# EAGLE board testPresssureSensor (EAGLE 8.2.1)
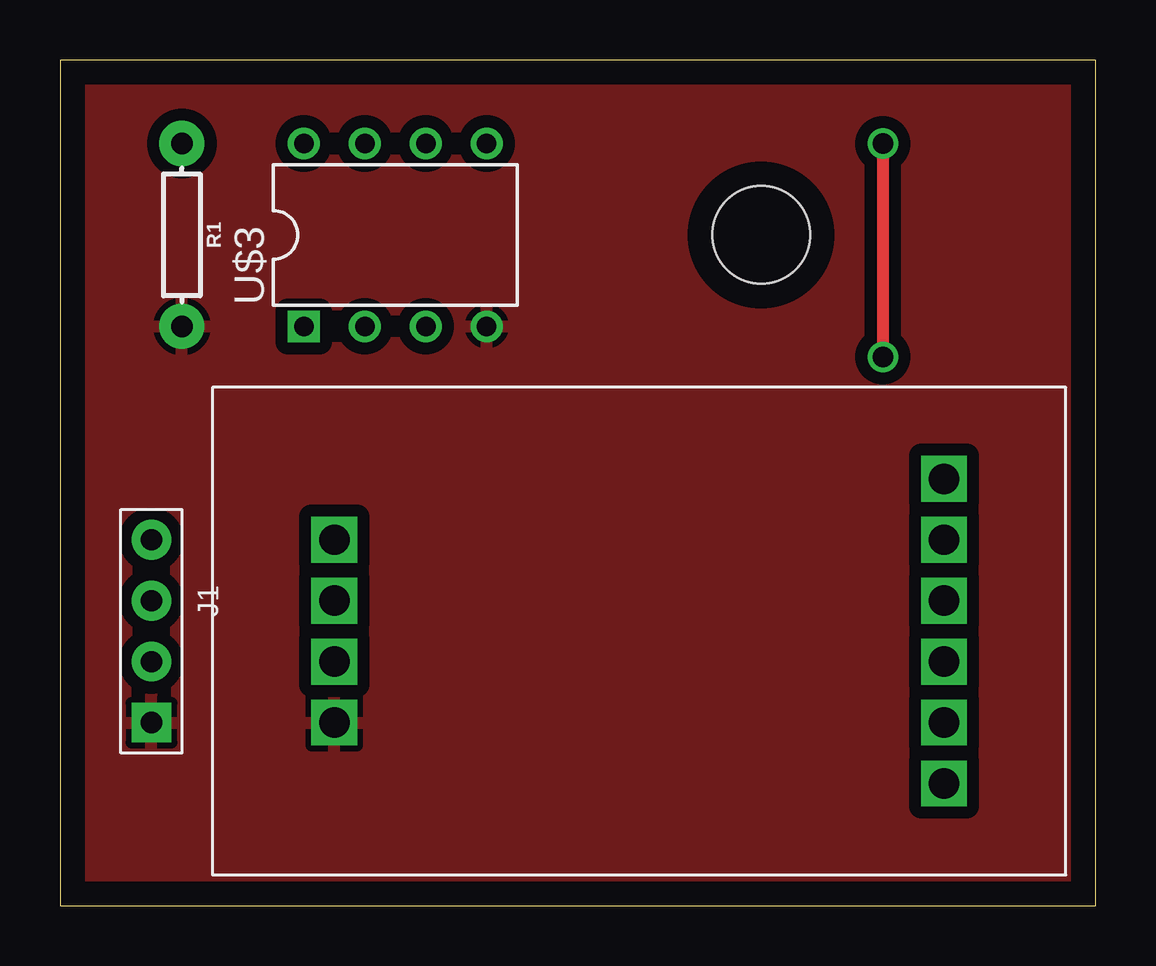
[diagram p0: board, top side]
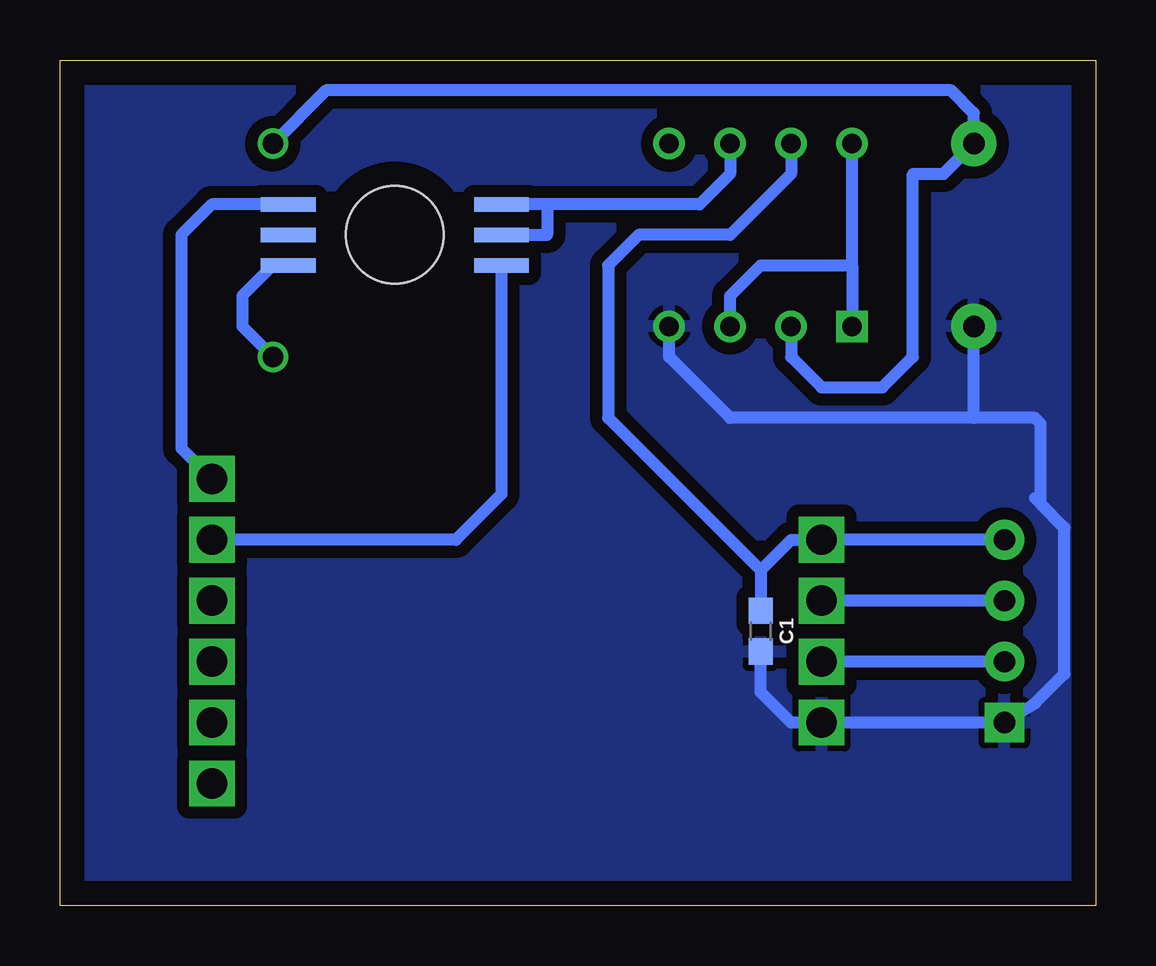
[diagram p1: board, bottom side, seen from below]

Size 43.16 x 35.23 mm. Coordinates in mm from the lower left corner, seen from the top.
Outline: 0,0 43.16,0 43.16,35.23 0,35.23 0,0
Copper layers (1*16): Top 0.035mm / dielectric 1.5mm / Bottom 0.035mm
Design rules "default *": minimum track width 6mil, minimum drill 0.35mm, track to track 20mil, track to pad 20mil, pad to pad 20mil, via to via 20mil, smd to smd 20mil, copper to edge 40mil, drill to drill 6mil, minimum pad ring 10mil, minimum via ring 8mil, stop-mask expansion 4mil, vias tented up to drill 0mil, thermal gap 10mil

## Footprints (pad centres in the part's own frame; a part is rotated, then mirrored left to right if it is on the bottom)
0603 = smd 1.1 x 1: 1 -0.85,0; 2 0.85,0
H4-2.54 = drill 0.889 pad 1.651 square: 1 0,3.81 | drill 0.889 pad 1.651: 2 0,1.27; 3 0,-1.27; 4 0,-3.81
AXIAL-0.3 = drill 0.9 pad 1.88: P$1 -3.81,0; P$2 3.81,0
2SMPP-03 = smd 2.286 x 0.61 bottom: P$1 4.445,1.27; P$2 4.445,0; P$3 4.445,-1.27; P$4 -4.445,-1.27; P$5 -4.445,0; P$6 -4.445,1.27 | hole 4.064: 0,0
HX711 = drill 1.27 square: P$1 -12.7,6.35; P$2 -12.7,3.81; P$3 -12.7,1.27; P$4 -12.7,-1.27; P$5 -12.7,-3.81; P$6 -12.7,-6.35; P$7 12.7,3.81; P$8 12.7,1.27; P$9 12.7,-1.27; P$10 12.7,-3.81
DIP8 = drill 0.813 square: 1 -3.81,-3.81 | drill 0.813: 2 -1.27,-3.81; 3 1.27,-3.81; 4 3.81,-3.81; 5 3.81,3.81; 6 1.27,3.81; 7 -1.27,3.81; 8 -3.81,3.81

## Placement (x,y rotation side)
C1  0.1uF  [0603]  13.97,11.43 270 bottom
J1  4p-2.54  [H4-2.54]  3.81,11.43 180 top
R1  1k  [AXIAL-0.3]  5.08,27.94 270 top
U$1  2SMPP-03  [2SMPP-03]  29.21,27.94 0 top
U$2  HX711  [HX711]  24.13,11.43 180 top
U$3  LM10CN  [DIP8]  13.97,27.94 0 top

## Library data of the parts
C1 = SparkFun-Capacitors; PROD_ID: CAP-00810
J1 = Seeed-Connector -2016; MPN: P125-1104A0BS116A1
R1 = SparkFun-Resistors; PROD_ID: RES-12182
U$1-U$3 = programmable-air-components

## Nets
GND: C1.2 J1.1 R1.P$2 U$2.P$7 U$3.4
N$1: U$1.P$4 U$2.P$5
N$2: U$3.1 U$3.3 U$3.8
N$3: U$1.P$5 U$1.P$6 U$3.6
N$4: R1.P$1 U$1.P$3 U$3.2
N$5: U$1.P$1 U$2.P$6
N$6: J1.2 U$2.P$8
N$7: J1.3 U$2.P$9
VIN: C1.1 J1.4 U$2.P$10 U$3.7

## Tracks (layer width: path | path; a pad name or v marks a point on that pad's centre or on a via)
GND
  Bottom 0.508: 2.3,16.75 1.31,15.75 1.31,9.65 2.54,8.42 J1.1 U$2.P$7 12.7,7.62 13.97,8.89 C1.2 | 2.3,16.75 2.54,16.98 | U$3.4 17.78,22.86 15.24,20.32 5.08,20.32 | 2.3,16.75 2.3,20.08 2.54,20.32 5.08,20.32 | 5.08,20.32 R1.P$2
  pour Top: 0,35.56 43.18,35.56 43.18,0 0,0
  pour Bottom: 0,35.56 43.18,35.56 43.18,0 0,0
N$1
  Bottom 0.508: U$1.P$4 24.77,17.14 26.67,15.24 U$2.P$5
N$2
  Bottom 0.508: 10.16,26.67 U$3.1 | 10.16,26.67 U$3.8 | U$3.3 15.24,25.4 13.97,26.67 10.16,26.67
N$3
  Bottom 0.508: U$1.P$5 22.86,27.94 22.86,29.21 | 22.86,29.21 U$1.P$6 | U$3.6 15.24,30.48 16.51,29.21 22.86,29.21
N$4  (via drill 0.85)
  Top 0.508: v34.29,31.75 v34.29,22.86
  Bottom 0.508: U$3.2 12.7,22.86 11.43,21.59 8.89,21.59 7.62,22.86 7.62,30.48 6.35,30.48 R1.P$1 | v34.29,31.75 32.08,33.96 6.02,33.96 5.08,33.02 R1.P$1 | U$1.P$3 34.29,26.67 35.56,25.4 35.56,24.13 v34.29,22.86 | 5.08,32.69 R1.P$1
N$5
  Bottom 0.508: U$1.P$1 36.83,29.21 38.1,27.94 38.1,19.05 U$2.P$6
N$6
  Bottom 0.508: J1.2 U$2.P$8
N$7
  Bottom 0.508: J1.3 U$2.P$9
VIN
  Bottom 0.508: J1.4 U$2.P$10 12.7,15.24 13.97,13.97 | 13.97,13.97 C1.1 | U$3.7 12.7,30.48 15.24,27.94 19.05,27.94 20.32,26.67 20.32,20.32 13.97,13.97